# EAGLE board ST link V2_my (EAGLE 7.6.0)
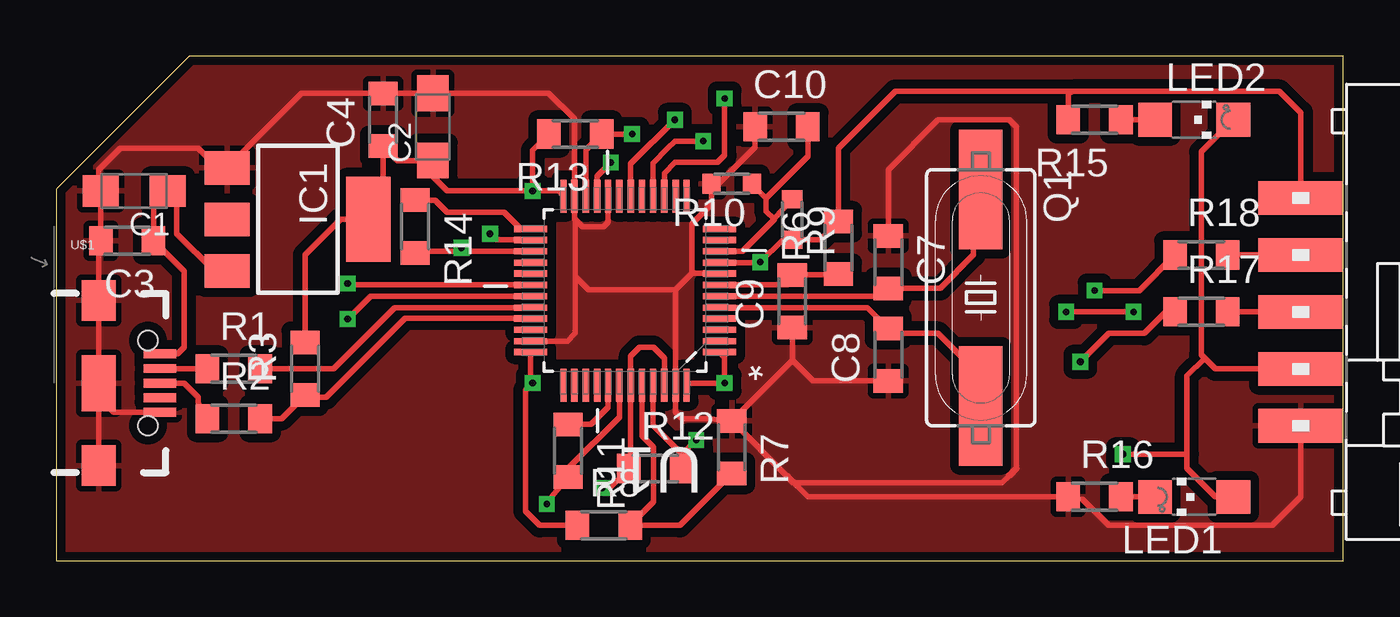
[diagram p0: board, top side]
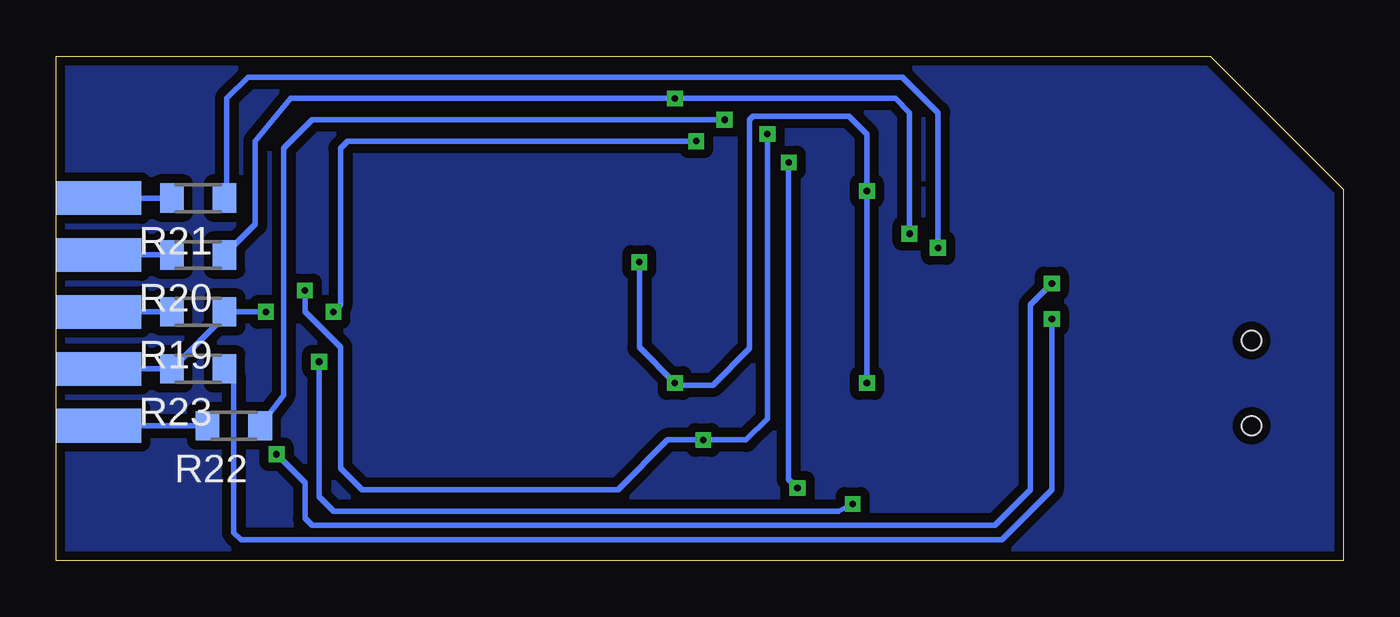
[diagram p1: board, bottom side, seen from below]

Size 57.45 x 22.53 mm. Coordinates in mm from the lower left corner, seen from the top.
Outline: 0,0 57.45,0 57.45,22.53 5.95,22.53 0,16.58 0,0
Copper layers (1*16): Top 0.035mm / dielectric 1.5mm / Bottom 0.035mm
Design rules "default *": minimum track width 10mil, minimum drill 0.3mm, track to track 8mil, track to pad 8mil, pad to pad 8mil, via to via 8mil, smd to smd 8mil, copper to edge 10mil, drill to drill 8mil, minimum pad ring 10mil, minimum via ring 8mil, stop-mask expansion 4mil, vias tented up to drill 0mil, thermal gap 10mil

## Footprints (pad centres in the part's own frame; a part is rotated, then mirrored left to right if it is on the bottom)
SMC_A = smd 1.6 x 1.4: + -1.5,0; - 1.5,0
C0805 = smd 1.05 x 1.3: 1 -1.175,0; 2 1.175,0
SOT223 = smd 1.5 x 2: 1 -2.3,-3.15; 2 0,-3.15; 3 2.3,-3.15 | smd 3.8 x 2: 4 0,3.15
CHIPLED_1206 = smd 1.5 x 1.5: A 0,-1.75; C 0,1.75
HC49UP = smd 5.334 x 1.93: 1 -4.826,0; 2 4.826,0
R0805 = smd 1.05 x 1.3: 1 -1.175,0; 2 1.175,0
R0603 = smd 0.8 x 0.9: 1 -0.9,0; 2 0.9,0
ML10_EDGE_SMD = smd 1.5 x 3.81: 1 -5.08,-6.35; 3 -2.54,-6.35; 5 0,-6.35; 7 2.54,-6.35; 9 5.08,-6.35 | smd 1.5 x 3.81 bottom: 2 -5.08,-6.35; 4 -2.54,-6.35; 6 0,-6.35; 8 2.54,-6.35; 10 5.08,-6.35
QFP50P900X900X160-48N = smd 1.473 x 0.279: 1 -4.216,2.743; 2 -4.216,2.261; 3 -4.216,1.753; 4 -4.216,1.245; 5 -4.216,0.762; 6 -4.216,0.254; 7 -4.216,-0.254; 8 -4.216,-0.762; 9 -4.216,-1.245; 10 -4.216,-1.753; 11 -4.216,-2.261; 12 -4.216,-2.743; 25 4.216,-2.743; 26 4.216,-2.261; 27 4.216,-1.753; 28 4.216,-1.245; 29 4.216,-0.762; 30 4.216,-0.254; 31 4.216,0.254; 32 4.216,0.762; 33 4.216,1.245; 34 4.216,1.753; 35 4.216,2.261; 36 4.216,2.743 | smd 0.279 x 1.473: 13 -2.743,-4.216; 14 -2.261,-4.216; 15 -1.753,-4.216; 16 -1.245,-4.216; 17 -0.762,-4.216; 18 -0.254,-4.216; 19 0.254,-4.216; 20 0.762,-4.216; 21 1.245,-4.216; 22 1.753,-4.216; 23 2.261,-4.216; 24 2.743,-4.216; 37 2.743,4.216; 38 2.261,4.216; 39 1.753,4.216; 40 1.245,4.216; 41 0.762,4.216; 42 0.254,4.216; 43 -0.254,4.216; 44 -0.762,4.216; 45 -1.245,4.216; 46 -1.753,4.216; 47 -2.261,4.216; 48 -2.743,4.216
USB-B-MICRO-SMD_V03 = smd 1.45 x 0.4: D+ 2.725,0; D- 2.725,0.65; GND 2.725,-1.3; ID 2.725,-0.65; VBUS 2.725,1.3 | smd 1.5 x 1.8: SHIELD1 0,3.685; SHIELD2 0,-3.685 | smd 1.5 x 2.5: SHIELD3 0,0 | hole 0.85: 2.2,1.9; 2.2,-1.9

## Placement (x,y rotation side)
C1  10u 16V  [SMC_A]  3.49,16.51 180 top
C2  10u 16V  [SMC_A]  16.83,19.37 90 top
C3  100n  [C0805]  3.17,14.29 180 top
C4  100n  [C0805]  14.61,19.68 90 top
C7  20p  [C0805]  37.15,13.34 270 top
C8  20p  [C0805]  37.15,9.21 90 top
C9  100n  [C0805]  32.86,11.59 90 top
C10  100n  [C0805]  32.38,19.37 0 top
IC1  LD117-3.3  [SOT223]  10.79,15.24 270 top
LED1  RED  [CHIPLED_1206]  50.8,2.86 90 top
LED2  GREEN  [CHIPLED_1206]  50.8,19.68 270 top
Q1  8000 kHz  [HC49UP]  41.27,11.75 270 top
R1  22R  [R0805]  7.94,8.57 0 top
R2  22R  [R0805]  7.94,6.35 0 top
R3  1K5  [R0805]  11.11,8.57 90 top
R6  100K  [R0805]  34.92,13.97 90 top
R7  100K  [R0805]  30.16,5.08 270 top
R8  bBridge  [R0805]  24.45,1.59 0 top
R9  5K1  [R0603]  32.86,15.24 270 top
R10  5K1  [R0603]  30.16,16.83 180 top
R11  220R  [R0805]  22.86,4.92 270 top
R12  220R  [R0805]  26.75,4.13 0 top
R13  680R  [R0805]  23.18,19.05 180 top
R14  220R  [R0805]  16.03,14.92 270 top
R15  620R  [R0805]  46.35,19.68 180 top
R16  620R  [R0805]  46.35,2.86 0 top
R17  22R  [R0805]  51.12,11.11 0 top
R18  22R  [R0805]  51.12,13.65 0 top
R19  22R  [R0805]  51.12,11.11 180 bottom
R20  22R  [R0805]  51.12,13.65 180 bottom
R21  22R  [R0805]  51.12,16.19 180 bottom
R22  22R  [R0805]  49.53,6.03 180 bottom
R23  10R  [R0805]  51.12,8.57 180 bottom
SV1  [ML10_EDGE_SMD]  61.91,11.11 270 top
U1  STM32F103CBT6  [QFP50P900X900X160-48N]  25.4,12.06 180 top
U$1  USB-MICROB"  [USB-B-MICRO-SMD_V03]  1.91,7.94 0 top

## Library data of the parts
C1-C4 C7-C10 R1-R3 R6-R23 = rcl
IC1 = v-reg
LED1 LED2 = led
Q1 = crystal; OC_FARNELL: unknown; OC_NEWARK: unknown
SV1 = Namenlos
U1 = ST Microelctronics_By_element14_Batch_1; MPN: STM32F103CBT6; OC_FARNELL: 1606327; OC_NEWARK: 11N8296; PACKAGE: QFP-48; SUPPLIER: STMICROELECTRONICS
U$1 = SparkFun-Connectors; PROD_ID: CONN-11752

## Nets
!STMRST: C9.2 R6.1 U1.7
+3V3: C2.+ C4.1 IC1.4 R3.2 R6.2 R8.1 R9.2 R13.2 R15.2 SV1.1 U1.1 U1.9 U1.24 U1.36 U1.48
+5V: C1.+ C3.1 IC1.3 U$1.VBUS
BOOT0: R7.2 R8.2 U1.44
GND: C1.- C2.- C3.2 C4.2 C7.1 C8.1 C9.1 C10.1 IC1.1 R7.1 R10.2 R16.1 SV1.9 U1.8 U1.20 U1.23 U1.35 U1.47 U$1.GND U$1.SHIELD1 U$1.SHIELD2 U$1.SHIELD3
N$1: R1.1 U$1.D-
N$2: R2.1 U$1.D+
N$4: C10.2 R9.1 R10.1 U1.10
N$5: R12.1 U1.21 U1.43 U1.46
N$6: C8.2 Q1.2 U1.5
N$7: C7.2 Q1.1 U1.6
N$8: R11.1 U1.41
N$9: R14.1 U1.25
N$10: LED2.A R15.1
N$12: LED1.C R16.2
SWIM: R12.2 R13.1 R18.1 U1.22 U1.45
SWIM_H: R18.2 SV1.3
SWIM_RST: R11.2 R17.1 U1.42
SWIM_RST_H: R17.2 SV1.5
T_JRST: U1.19
T_JTCK: R20.1 U1.15 U1.26
T_JTCK_H: R20.2 SV1.4
T_JTDI: U1.17
T_JTDO: R19.1 R23.2 SV1.8 U1.16
T_JTDO_H: R19.2 SV1.6
T_JTMS: R14.2 R21.1 U1.27
T_JTMS_H: R21.2 SV1.2
T_NRST: R22.1 U1.18
T_NRST_H: R22.2 SV1.10
U1_BL_RX: R23.1 U1.31
U1_BL_TX: LED1.A LED2.C SV1.7 U1.30
USB_D+: R2.2 R3.1 U1.33
USB_D-: R1.2 U1.32

## Tracks (layer width: path | path; a pad name or v marks a point on that pad's centre or on a via)
!STMRST
  Top 0.254: U1.7 32.64,12.32 32.7,12.38 32.48,12.38 C9.2 34.89,12.76 R6.1
+3V3  (via drill 0.3)
  Top 0.254: R3.2 11.11,13.65 12.7,15.24 IC1.4 14.61,15.9 C4.1 15.25,17.87 C2.+ 16.83,17.14 17.46,16.51 v21.27,16.51 | U1.36 21.18,8.03 v21.27,7.94 20.95,7.62 20.95,2.22 21.59,1.59 R8.1 | U1.1 29.84,9.09 v29.84,7.94 28.23,7.94 U1.48 | U1.9 31.41,13.31 v31.43,13.34 32.44,14.34 R9.2 34.12,14.34 R6.2 34.92,18.41 37.47,20.95 45.4,20.95 | U1.24 22.43,16.51 v21.27,16.51 | R13.2 21.27,18.32 v21.27,16.51 | 45.4,20.95 45.18,20.86 R15.2 | 54.61,16.19 SV1.1 55.56,20 54.61,20.95 45.4,20.95
  Top 0.305: v21.27,16.51 21.27,16.6 | SV1.1 55.56,16.51
  Bottom 0.254: v21.27,7.94 v21.27,16.51 21.27,19.05 22.07,19.84 26.35,19.84 26.51,19.68 26.51,9.48 U1.48 29.76,7.85 v29.84,7.94 31.43,9.53 v31.43,13.34
+5V
  Top 0.254: U$1.VBUS 5.43,9.24 5.71,9.53 5.71,12.92 C3.1 4.35,15.87 C1.+ 5.4,16.11 5.4,14.61 7.06,12.94 IC1.3
BOOT0
  Top 0.254: U1.44 26.16,5.59 26.67,5.08 26.67,2.76 26.67,2.63 R8.2 27.84,1.59 R7.2
GND
  Top 0.254: U$1.SHIELD2 1.91,7.3 | 1.91,7.3 U$1.SHIELD3 U$1.SHIELD1 1.91,14.19 C3.2 C1.- 1.91,16.6 1.91,17.46 2.86,18.41 6.35,18.41 7.22,17.54 IC1.1 10.96,20.86 C4.2 C2.- 22,20.87 23.14,19.72 U1.23 23.14,15.28 23.18,15.24 | U$1.GND 2.57,6.64 1.91,7.3 | 23.18,15.24 23.5,14.92 24.45,14.92 24.64,15.11 U1.20 | U1.35 22.82,9.8 23.18,10.16 23.18,12.7 | 23.18,12.7 23.18,15.24 | 27.66,12.1 U1.47 27.66,6.63 27.94,6.35 29.11,6.35 R7.1 | 27.66,12.1 28.38,12.83 | U1.8 28.38,12.83 | 27.66,12.1 23.77,12.1 23.18,12.7 | 28.38,12.83 28.38,15.05 29.26,15.93 R10.2 29.62,16.87 31.21,18.46 C10.1 | C9.1 32.86,8.95 | 32.86,8.95 R7.1 | C8.1 33.78,8.03 32.86,8.95 | C7.1 37.15,17.46 39.37,19.68 42.55,19.68 42.86,19.37 42.86,4.13 | 42.55,3.81 42.23,3.49 32.92,3.49 | R7.1 32.66,3.76 33.56,2.86 R16.1 45.81,2.76 46.99,1.59 54.29,1.59 55.56,2.86 SV1.9
  Top 0.305: 42.86,4.13 42.55,3.81 | 32.92,3.49 32.66,3.76
  pour Bottom (isolate 0.406): 0,0 57.47,0 57.47,22.54 6.03,22.54 0,16.51
  pour Top (isolate 0.406): 0,0 0,16.51 6.03,22.54 57.47,22.54 57.47,0
N$1
  Top 0.254: U$1.D- 6.75,8.59 R1.1
N$2
  Top 0.254: U$1.D+ 5.71,7.94 6.35,7.3 6.35,7.08 R2.1
N$4
  Top 0.254: U1.10 30.64,13.82 32.07,15.24 | 32.07,15.24 32.02,15.24 R9.1 | R10.1 31.7,16.19 | 31.7,16.19 31.7,15.61 32.07,15.24 | C10.2 33.56,18.05 31.7,16.19
N$5  (via drill 0.3)
  Top 0.254: U1.46 27.15,9.04 26.67,9.53 26.04,9.53 25.65,9.14 U1.43 25.65,4.21 R12.1 | U1.21 24.16,17.17 v24.77,17.78 | 25.4,3.95 R12.1 | v24.37,3.25 24.7,3.25 R12.1
  Bottom 0.254: v24.77,17.78 24.77,3.81 24.77,3.65 v24.37,3.25
N$6
  Top 0.254: U1.5 30.92,11.3 36.23,11.3 C8.2 37.05,10.16 39.37,10.16 40.96,8.57 Q1.2
N$7
  Top 0.254: U1.6 36.8,11.81 C7.2 39.47,12.16 40.96,13.65 40.96,15.88 Q1.1
N$8
  Top 0.254: U1.41 24.64,6.86 24.13,6.35 23.88,6.1 R11.1
N$9
  Top 0.254: R14.1 16.92,16.1 17.46,15.56 20,15.56 20.75,14.81 U1.25
N$10
  Top 0.254: LED2.A R15.1
N$12
  Top 0.254: R16.2 LED1.C
SWIM  (via drill 0.3)
  Top 0.254: U1.45 26.64,6.06 27.94,4.76 | 27.94,4.76 27.94,4.14 R12.2 | U1.22 23.65,18.34 R13.1 v25.72,19.05 | 27.94,4.76 v28.57,5.4 | v46.35,12.06 48.35,12.06 R18.1
  Bottom 0.254: v25.72,19.05 25.72,6.35 26.67,5.4 v28.57,5.4 30.16,5.4 32.38,3.17 43.81,3.17 44.77,4.13 44.77,9.53 46.35,11.11 v46.35,12.06
SWIM_H
  Top 0.254: SV1.3 R18.2
SWIM_RST  (via drill 0.3)
  Top 0.254: U1.42 25.15,6.41 | 25.15,6.41 22.86,4.13 R11.2 22.13,2.86 v21.91,2.54 | 25.15,6.41 24.45,5.71 | R17.1 49.53,11.11 48.58,10.16 46.99,10.16 v45.72,8.89
  Bottom 0.254: v45.72,8.89 45.72,2.86 45.09,2.22 22.54,2.22 v21.91,2.54
SWIM_RST_H
  Top 0.254: SV1.5 R17.2
T_JTCK  (via drill 0.3)
  Top 0.254: U1.26 19.65,14.33 v19.37,14.61 | U1.15 27.15,17.31 27.62,17.78 29.53,17.78 29.84,18.1 v29.84,20.64
  Bottom 0.254: v19.37,14.61 19.37,16.83 19.37,20 20,20.64 v29.84,20.64 46.99,20.64 48.58,18.73 48.58,15.56 48.58,15.02 R20.1
  Bottom 0.305: 49.85,13.75 R20.1
T_JTCK_H
  Bottom 0.254: R20.2 SV1.4
T_JTDO  (via drill 0.3)
  Top 0.254: U1.16 26.64,17.75 27.3,18.41 27.62,18.73 v28.89,18.73 | v45.09,11.11 v48.1,11.11
  Bottom 0.254: v28.89,18.73 44.45,18.73 44.77,18.41 44.77,11.43 v45.09,11.11 | SV1.8 R23.2 49.94,10.92 R19.1 v48.1,11.11
T_JTDO_H
  Bottom 0.254: R19.2 SV1.6
T_JTMS  (via drill 0.3)
  Top 0.254: U1.27 18.1,13.82 | 18.1,13.82 16.03,13.82 R14.2 | v18.1,13.97 18.1,13.82
  Bottom 0.254: v18.1,13.97 18.1,20 19.68,21.59 46.67,21.59 48.9,21.59 49.85,20.64 49.85,16.29 R21.1
T_JTMS_H
  Bottom 0.254: R21.2 SV1.2
T_NRST  (via drill 0.3)
  Top 0.254: U1.18 25.65,17.72 v27.62,19.68
  Bottom 0.254: v27.62,19.68 46.04,19.68 47.31,18.41 47.31,7.4 R22.1
T_NRST_H
  Bottom 0.254: SV1.10 R22.2
U1_BL_RX  (via drill 0.3)
  Top 0.254: U1.31 14.03,11.81 v13.02,10.79
  Bottom 0.254: v13.02,10.79 13.02,3.17 15.24,0.95 49.21,0.95 49.53,1.27 49.53,4.45 49.53,8.16 R23.1
U1_BL_TX  (via drill 0.3)
  Top 0.254: U1.30 13.08,12.32 v13.02,12.38 | 51.28,9.05 51.12,9.21 51.12,18.25 LED2.C | 51.28,9.05 51.75,8.57 SV1.7 | LED1.A 51.75,2.86 50.48,4.13 50.48,4.76 | 50.48,4.76 50.48,8.26 51.28,9.05 | v47.62,4.76 50.48,4.76
  Bottom 0.254: v13.02,12.38 13.97,11.43 13.97,3.17 15.56,1.59 46.04,1.59 46.35,1.91 46.35,3.49 v47.62,4.76
USB_D+
  Top 0.254: 11.34,7.62 R3.1 | R2.2 10.06,6.35 R3.1 | R3.1 11.21,7.3 12.06,7.3 15.58,10.82 U1.33
USB_D-
  Top 0.254: U1.32 15.11,11.3 12.38,8.57 R1.2